# Altium PCB CNC_shield_mkr1000_PCB_v5.PcbDoc
Units mm, origin at the board's own origin, x right, y up, seen from the top; angles counter-clockwise.
Board outline 96.52 x 76.2 mm, 2 copper layers (Top Layer, Bottom Layer); 20 components, 40 nets, 141 pads, 0 vias.
Unrouted connection lines stored in the file: 1.
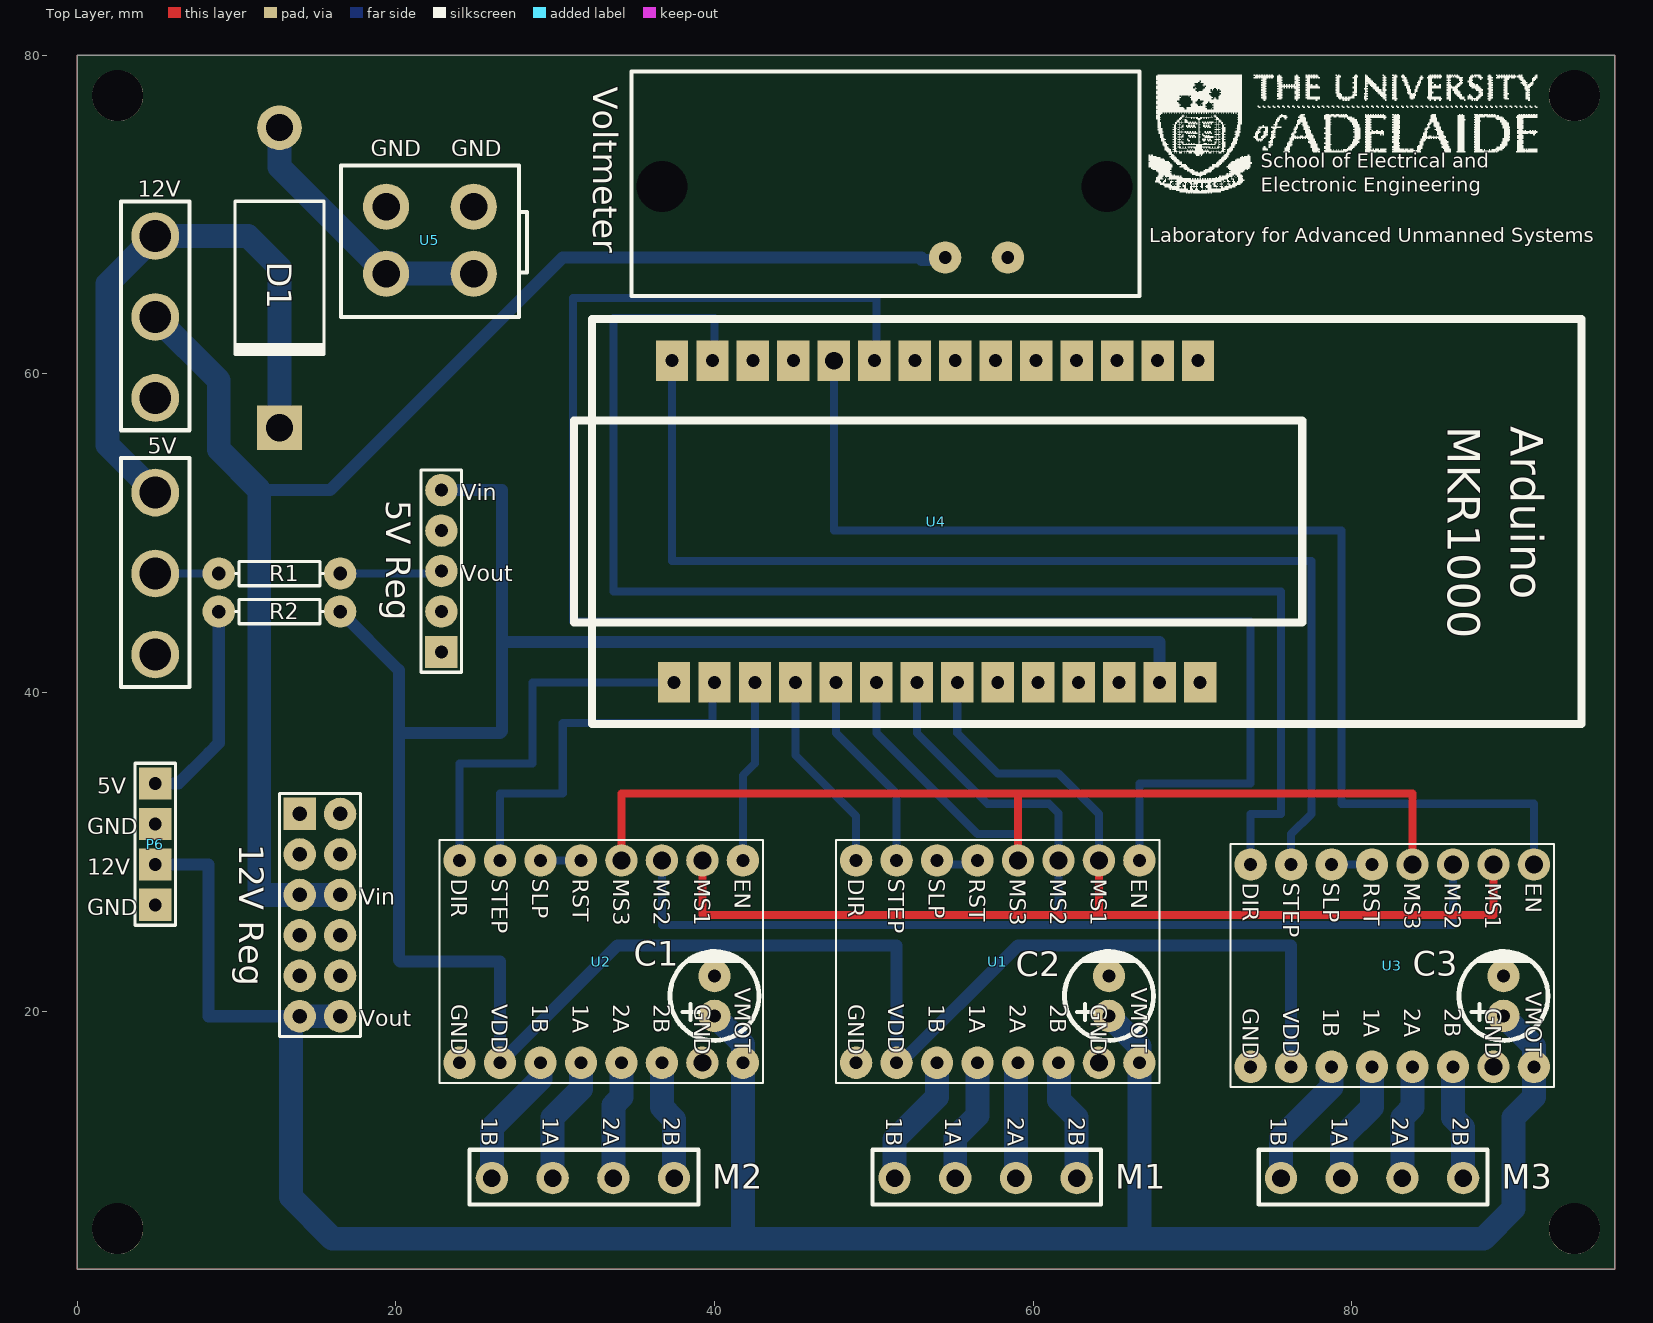
[diagram p0: Top Layer view]
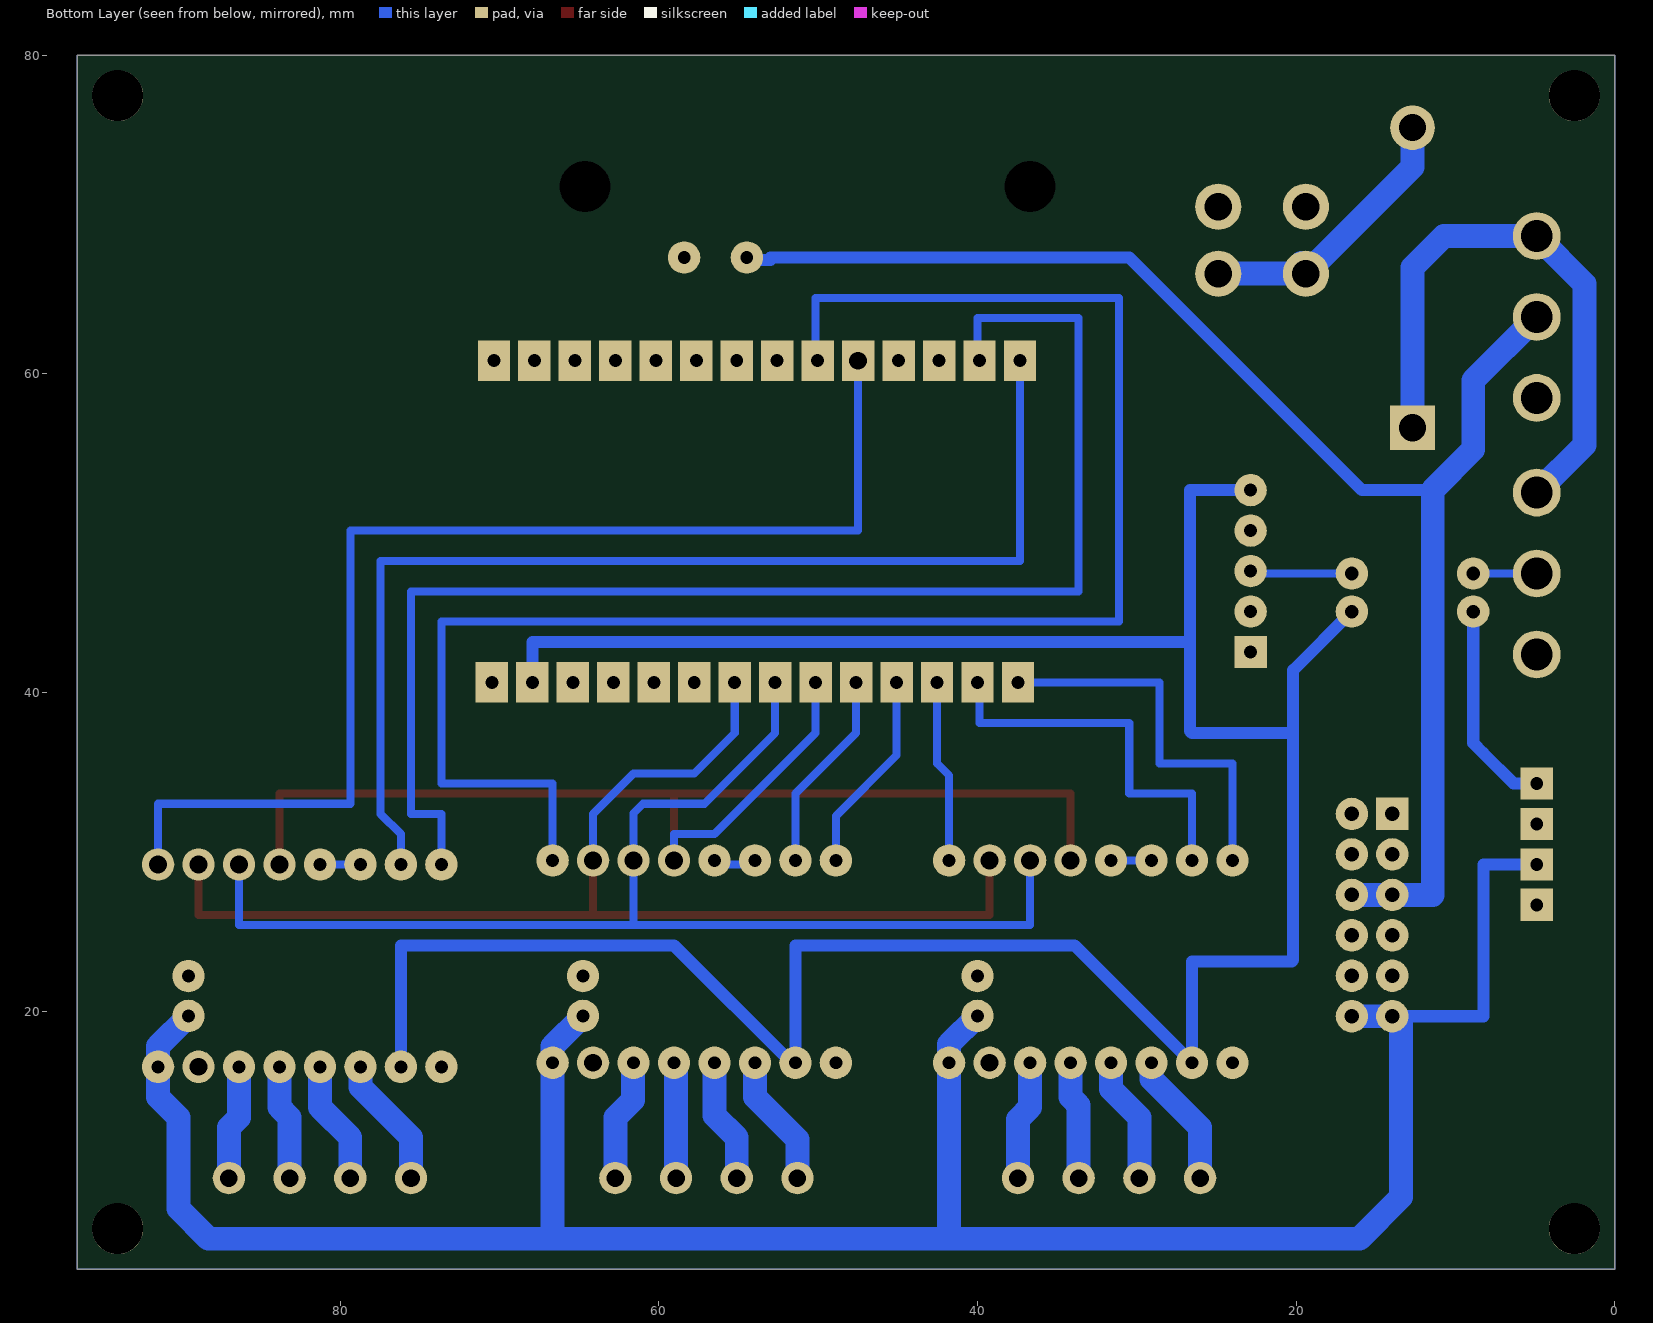
[diagram p1: Bottom Layer view, seen from below]

## Layer stack, top to bottom
Top Solder: solder mask 0.0102, Solder Resist, Dk 3.5
Top Layer: signal copper 0.0356
Dielectric1: dielectric 0.32, FR-4, Dk 4.8
Bottom Layer: signal copper 0.0356
Bottom Solder: solder mask 0.0102, Solder Resist, Dk 3.5

## Board outline
0,3.81 96.52,3.81 96.52,80.01 0,80.01

## Design rules (kind name [scope] priority, off if disabled: settings)
Clearance [All] p1: gap=0.152 ignorepadtopadclearanceinfootprint=FALSE except(0: Arc-Hole Track-Hole SMDPad-Hole THPad-Hole Via-Hole Fill-Hole Poly-Hole Region-Hole Text-Hole)
PlaneClearance [All] p1: clearance=0.203
PolygonConnect [All] p1: connectstyle=Relief reliefconductorwidth=0.508 reliefentries=4 polygonreliefangle="90 Angle" airgapwidth=0.254
RoutingVias [All] p1: holewidth=0.305 width=0.559 viastyle="Through Hole" minholewidth=0.305 minwidth=0.559 maxholewidth=0.305 maxwidth=0.559
SolderMaskExpansion [All] p1: expansion=0.102
Width Power [InNetClass('Power')] p1: maxlimit=1.27 minlimit=0.381 preferedwidth=0.762 minimp=50.000000 maximp=50.000000 favimp=50.000000
Width [All] p2: maxlimit=1.27 minlimit=0.152 preferedwidth=0.508 minimp=50.000000 maximp=50.000000 favimp=50.000000
29 further rules are at their usual default settings.

## Classes and differential pairs
component class CNC_shield_for_mkr1000_Sch: "5V Reg" C1 C2 C3 J1 J2 U1 U2 U4 U5

## Components (designator, comment, footprint, x,y, rotation, side; value= is the part's Value field where it differs from the comment)
5V "Comment" Switch 2.743,40.361 r90 top
"5V Reg" "Header 5" HDR1X5 22.86,42.545 r90 top (schematic designator P4)
12V "Comment" Switch 2.743,56.464 r90 top
"12V Reg" "Comment" HDR2X6 13.97,32.385 r270 top
C1 "C43803" C43803 40.005,20.955 r90 top
C2 "C43803" C43803 64.77,20.955 r90 top
C3 "C43803" C43803 89.535,20.955 r90 top
D1 "Comment" DO-201AD 12.7,66.04 r270 top
M1 "Header 1 x 4" "Female Header for driver" 56.007,9.652 r0 top (schematic designator P1)
M2 "Header 1 x 4" "Female Header for driver" 30.734,9.652 r0 top (schematic designator P2)
M3 "Header 1 x 4" "Female Header for driver" 80.264,9.652 r0 top (schematic designator P3)
P6 "Header 1 x 4" HDR1X4 4.902,26.67 r90 top (schematic designator P2)
R1 "Comment" AXIAL-0.3 12.7,47.473 r0 top
R2 "Comment" AXIAL-0.3 12.7,45.085 r0 top
U1 "A4988" "A4988 DRIVER"#1 57.785,23.114 r270 top
U2 "A4988" "A4988 DRIVER"#1 32.893,23.114 r270 top
U3 "A4988" "A4988 DRIVER"#2 82.55,22.86 r270 top
U4 "MKR 1000" MKR1000 53.911,50.736 r270 top
U5 "ATX 4" ATX4 22.142,68.394 r0 top
Voltmeter "Comment" Voltmeter 50.165,71.628 r0 top

## Footprints (in the part's own frame and the unit in brackets; to place one, negate y for a bottom-side part, rotate by r counter-clockwise, add the part's x,y. Pads: shape width x height; smd on the part's side, far side on the other; paste and mask are expansions set on the pad)
"A4988 DRIVER"#1 [mil]
  round 80 hole 32: 1(-250,350) 5(-250,-50) 6(-250,-150) 7(-250,-250) 8(-250,-350) 9(250,-350) 10(250,-250) 11(250,-150) 12(250,-50) 13(250,50) 14(250,150) 16(250,350)
  round 80 hole 44.02: 2(-250,250)
  round 80 hole 44: 3(-250,150) 4(-250,50) 15(250,250)
  silkscreen extent -300,-400 300,400
"A4988 DRIVER"#2 [mil]
  round 80 hole 44: 1(-250,350) 3(-250,150) 4(-250,50) 15(250,250)
  round 80 hole 44.02: 2(-250,250)
  round 80 hole 32: 5(-250,-50) 6(-250,-150) 7(-250,-250) 8(-250,-350) 9(250,-350) 10(250,-250) 11(250,-150) 12(250,-50) 13(250,50) 14(250,150) 16(250,350)
  silkscreen extent -300,-400 300,400
ATX4 [mil]
  round 114.21 hole 68: 1(-108.25,-82.7) 2(-108.25,82.7) 3(108.25,-82.7) 4(108.25,82.7)
  silkscreen extent -220,-190 240,185
AXIAL-0.3 [mil] "Axial Device, Thru-Hole; 2 Leads; 0.3 in Pin Spacing"
  round 80 hole 33.46: 1(-150,0) 2(150,0)
  silkscreen extent -109,-30 109,30
C43803 [mil] "Polarized Capacitor with 16V 5*7"
  round 80 hole 32: 1(-49.21,0) 2(49.21,0)
  silkscreen extent -110,-110 110,110
DO-201AD [mm] "Diode, Axial; Body 9.5 x 5.6 mm (LxDia. max), Lead Dia. 1.32 mm (max)"
  round 2.8 hole 1.7: 1(-9.42,0)
  rect 2.8x2.8 hole 1.7: 2(9.42,0)
  silkscreen extent -4.8,-2.8 4.9,2.8
"Female Header for driver" [mil] "EC381V"
  round 80 hole 43.31: 1(-185,-5) 2(-35,-5) 3(115,-5) 4(265,-5)
  silkscreen extent -240,-70 325,65
HDR1X4 [mil] "Connector; Header; 4 Position"
  rect 80x80 hole 32: 1(0,0) 2(100,0) 3(200,0) 4(300,0)
  silkscreen extent -50,-50 350,50
HDR1X5 [mil] "Connector; Header; 5 Position"
  rect 80x80 hole 32: 1(0,0)
  round 80 hole 32: 2(100,0) 3(200,0) 4(300,0) 5(400,0)
  silkscreen extent -50,-50 450,50
HDR2X6 [mil] "Connector; Header; 6x2 Position"
  rect 80x80 hole 35.43: 1(0,0)
  round 80 hole 35.43: 2(0,100) 3(100,0) 4(100,100) 5(200,0) 6(200,100) 7(300,0) 8(300,100) 9(400,0) 10(400,100) 11(500,0) 12(500,100)
  silkscreen extent -50,-50 550,150
MKR1000 [mil]
  rect 100x80 hole 32: 1(-397.5,647.5) 1(-397.5,647.5) 2(-397.5,547.5) 2(-397.5,547.5) 3(-397.5,447.5) 4(-397.5,347.5) 5(-397.5,247.5) 6(-397.5,147.5) 7(-397.5,47.5) 8(-397.5,-52.5) 9(-397.5,-152.5) 11(-397.5,-352.5) 12(-397.5,-452.5) 13(-397.5,-552.5) 14(-397.5,-652.5) 15(397.5,-647.5) 16(397.5,-547.5) 17(397.5,-447.5) 18(397.5,-347.5) 19(397.5,-247.5) 20(397.5,-147.5) 21(397.5,-47.5) 22(397.5,52.5) 23(397.5,152.5) 24(397.5,252.5) 25(397.5,352.5) 26(397.5,452.5) 27(397.5,552.5) 28(397.5,652.5)
  rect 100x80 hole 44: 10(-397.5,-252.5)
  silkscreen extent -500,-895 500,1595
Switch [mm]
  round 3 hole 2: 1(2.032,-2.159) 2(7.112,-2.159) 3(12.192,-2.159)
  silkscreen extent 0,-4.32 14.35,0
Voltmeter [mil]
  round 106.3 hole 125.98: 2(-530,5) 2(570,5)
  round 80 hole 31.5: V1(325,-170) V2(170,-170)
  silkscreen extent -605,-265 650,290

## Part data
"5V Reg": library part Header1x5, "Header, 5-Pin"
"12V Reg": library part "Header 6X2"
C1 C2 C3: "Polarized Capacitor"
M1 M2 M3 P6: "Header, 4-Pin"
  M1 M2 M3: LatestRevisionDate=17-Jul-2002, LatestRevisionNote="Re-released for DXP Platform.", Publisher="Altium Limited"
U1 U2 U3: "Motor Driver"
U4: library part "Arduino MKR 1000", "Arduino wifi"
U5: "ATX 4Pins power connector"

## Free pads (board coordinates)
  round 3.2 hole 3.2 unplated: 1(2.54,6.35) 2(2.54,77.47) 3(93.98,6.35) 4(93.98,77.47)

## Nets (pads, with @x,y where several pads share a name; then routed paths per layer and width w, separated by ;. In a path a pad name is that pad's centre, name@x,y a point inside that pad or via, vN(x,y) a via of type N, cw(c..) or ccw(c..) an arc to the next point about the centre after c; other vN are vias at no path point)
GND: "5V Reg.4" "12V Reg.7" "12V Reg.8" "12V Reg.9" "12V Reg.10" C1.2 C2.2 C3.2 P6.1 P6.3 pad.1 U1.9 U1.15 U2.9 U2.15 U3.9 U3.15 U4.25 U5.2 U5.4 Voltmeter.V1 | length 0.3
  Bottom Layer w0.254: U5.4@24.809,70.578 U5.4 ; U2.15@39.094,16.913 U2.15
NetC1_1: 
NetD1_1: 
NetP1_1: M1.1 U1.11 | length 8.1
  Bottom Layer w1.5: M1.1 51.308,11.938 53.975,14.605 U1.11@53.975,16.51
NetP1_2: M1.2 U1.12 | length 7.6
  Bottom Layer w1.5: M1.2 55.118,12.065 56.515,13.462 U1.12@56.515,16.51
NetP1_3: M1.3 U1.13 | length 7
  Bottom Layer w0.508: U1.13@58.928,16.383 U1.13@59.055,16.51
  Bottom Layer w1.5: M1.3 U1.13@58.928,16.383
NetP1_4: M1.4 U1.14 | length 7.5
  Bottom Layer w0.508: U1.14@61.595,16.51 U1.14@61.635,16.47
  Bottom Layer w1.5: U1.14@61.635,16.47 61.635,14.438 62.738,13.335 M1.4
NetP2_1: M2.1 U2.11 | length 8.5
  Bottom Layer w1.5: M2.1 26.035,12.7 29.083,15.748 U2.11
NetP2_2: M2.2 U2.12 | length 8
  Bottom Layer w1.5: M2.2 29.845,13.335 31.623,15.113 U2.12
NetP2_3: M2.3 U2.13 | length 8.2
  Bottom Layer w0.508: U2.13@33.655,16.256 U2.13
  Bottom Layer w1.5: M2.3 33.655,14.097 34.163,14.605 U2.13
NetP2_4: M2.4 U2.14 | length 7.6
  Bottom Layer w1.5: U2.14 36.703,13.97 37.465,13.208 M2.4
NetP3_1: M3.1 U3.11 | length 8.3
  Bottom Layer w1.5: M3.1 75.565,12.065 78.74,15.24 U3.11
NetP3_2: M3.2 U3.12 | length 7.8
  Bottom Layer w1.5: M3.2 79.375,12.065 81.28,13.97 U3.12
NetP3_3: M3.3 U3.13 | length 7.2
  Bottom Layer w1.5: M3.3 83.185,13.335 83.82,13.97 U3.13
NetP3_4: M3.4 U3.14 | length 7.2
  Bottom Layer w1.5: U3.14 86.36,13.335 86.995,12.7 M3.4
NetP4_3: 
NetP4_5: "5V Reg.5" P6.4 R2.1 R2.2 U1.10 U2.10 U3.10 U4.27 | length 189.5
  Bottom Layer w0.762: P6.4 6.35,34.29 8.255,36.195 8.89,36.83 R2.1 ; R2.2 20.193,41.402 20.193,23.203 ; 20.282,23.114 26.543,23.114 ; 20.32,37.465 26.543,37.465 26.67,37.592 26.67,43.18 ; 22.86,52.705 26.67,52.705 26.67,43.18 ; 26.543,23.038 U2.10 33.909,24.13 51.435,24.13 51.435,16.51 59.055,24.13 76.2,24.13 U3.10 ; U4.27 67.945,43.18 26.67,43.18
NetU1_1: U1.1 U4.9 | length 108.1
  Bottom Layer w0.508: U4.9 50.165,60.96 50.165,64.77 31.115,64.77 31.115,44.45 73.66,44.45 73.66,34.29 66.675,34.29 U1.1 U1.1@66.675,29.21
NetU1_2: U1.2 U2.2 U3.2 U4.22 | length 76.8
  Top Layer w0.508: U2.2 39.243,26.035 64.135,26.035 ; U1.2@64.135,29.21 64.135,26.035 ; U3.2 88.9,26.035 64.135,26.035
  Bottom Layer w0.508: U4.22 55.245,37.465 57.785,34.925 61.595,34.925 64.135,32.385 U1.2 U1.2@64.135,29.21
NetU1_3: U1.3 U2.3 U3.3 U4.21 | length 78.7
  Bottom Layer w0.508: U2.3 36.703,25.4 61.595,25.4 ; U4.21 52.705,37.465 57.15,33.02 61,33.02 61.595,32.425 U1.3 61.595,25.4 ; U3.3 86.36,25.4 61.595,25.4
NetU1_4: U1.4 U2.4 U3.4 U4.20 | length 79.4
  Top Layer w0.508: U2.4 34.163,33.655 58.991,33.655 ; U1.4@59.055,29.21 U1.4 59.055,33.591 58.991,33.655 ; U3.4 83.82,33.655 58.991,33.655
  Bottom Layer w0.508: U4.20 50.165,37.465 56.515,31.115 59.055,31.115 U1.4 U1.4@59.055,29.21
NetU1_5: U1.5 U1.6 | length 2.5
  Bottom Layer w0.508: U1.6@53.975,29.21 U1.5@56.515,29.21
NetU1_7: U1.7 U4.19 | length 13
  Bottom Layer w0.508: U4.19 47.625,37.465 51.435,33.655 U1.7 U1.7@51.435,29.21
NetU1_8: U1.8 U4.18 | length 13
  Bottom Layer w0.508: U4.18 45.085,36.068 48.895,32.258 U1.8 U1.8@48.895,29.21
NetU2_1: U2.1 U4.17 | length 11.5
  Bottom Layer w0.508: U2.1 41.783,34.798 42.545,35.56 U4.17
NetU2_5: U2.5 U2.6 | length 2.5
  Bottom Layer w0.508: U2.6 U2.5
NetU2_7: U2.7 U4.16 | length 24.6
  Bottom Layer w0.508: U2.7 26.543,33.655 30.48,33.655 30.48,38.1 39.878,38.1 39.878,40.513 U4.16
NetU2_8: U2.8 U4.15 | length 24.6
  Bottom Layer w0.508: U2.8 24.003,35.56 28.575,35.56 28.575,40.64 U4.15
NetU3_1: U3.1 U4.10 | length 75.6
  Bottom Layer w0.508: U4.10 47.498,50.165 79.375,50.165 79.375,33.02 91.44,33.02 U3.1
NetU3_5: U3.5 U3.6 | length 2.5
  Bottom Layer w0.508: U3.6 U3.5
NetU3_7: U3.7 U4.14 | length 72.3
  Bottom Layer w0.508: U4.14 37.338,48.26 77.47,48.26 77.47,32.385 76.2,31.115 U3.7
NetU3_8: U3.8 U4.13 | length 87.2
  Bottom Layer w0.508: U4.13 40.005,60.96 40.005,63.5 33.655,63.5 33.655,46.355 75.565,46.355 75.565,32.385 73.66,32.385 U3.8
RegulatorNet: 12V.2 "12V Reg.5" "12V Reg.6" Voltmeter.V2 | length 93.4
  Bottom Layer w0.508: 52.996,67.161 52.996,67.31 ; Voltmeter.V2@54.334,67.161 Voltmeter.V2
  Bottom Layer w0.762: 11.43,52.705 15.875,52.705 30.48,67.31 52.996,67.31 ; 52.996,67.161 Voltmeter.V2@54.334,67.161
  Bottom Layer w1.5: 12V.2 8.89,59.588 8.89,55.245 11.43,52.705 11.43,27.305 13.97,27.305 16.51,27.305
RegulatorOutNet: "12V Reg.11" "12V Reg.12" C1.1 C2.1 C3.1 P6.2 U1.16 U2.16 U3.16 | length 154
  Bottom Layer w0.762: P6.2 8.255,29.21 8.255,19.685 13.97,19.685
  Bottom Layer w1.5: 16.51,19.685 13.97,19.685 13.411,19.126 13.411,8.331 16.027,5.715 41.783,5.715 ; C1.1 41.783,17.927 U2.16 41.783,5.715 ; C2.1 66.675,17.8 U1.16 ; U1.16@66.675,16.51 66.675,5.715 ; C3.1 91.44,17.8 U3.16 91.44,14.605 90.17,13.335 90.17,7.62 88.265,5.715 66.675,5.715 ; 41.783,5.715 66.675,5.715
switch1-1: 5V.3 12V.3 D1.2 | length 37.3
  Bottom Layer w1.5: 5V.3 1.905,55.55 1.905,65.659 12V.3 10.719,68.656 12.7,66.675 D1.2
switch1-2: 
switch2-1: D1.1 U5.1 U5.3 | length 17.9
  Bottom Layer w1.5: D1.1 12.7,72.987 U5.1 ; U5.1@19.393,66.954 19.667,66.954 20.053,66.568 20.053,66.294 U5.3
switch2-2: 5V.2 "5V Reg.3" R1.1 R1.2 | length 10.4
  Bottom Layer w0.508: 5V.2 R1.1 ; R1.2 22.708,47.473 22.86,47.625
Volt1: 
Volt2: 
pads on no net: 5V.1 12V.1 "5V Reg.1" "5V Reg.2" "12V Reg.1" "12V Reg.2" "12V Reg.3" "12V Reg.4" U4.1 U4.2 U4.3 U4.4 U4.5 U4.6 U4.7 U4.8 U4.11 U4.12 U4.23 U4.24 U4.26 U4.28 Voltmeter.2

## Polygon pours and split planes (outlines as drawn)
GND on Bottom Layer "NONET_L02_P115" (solid, remove dead copper, shelved, pour order 115): 0,80.01 0,3.81 96.52,3.81 96.52,80.01
GND on Top Layer "NONET_L01_P117" (solid, remove dead copper, shelved, pour order 117): 0,80.01 96.52,80.01 96.52,3.81 0,3.81

## Silkscreen, mask and mechanical layers (free items; w line width, h text height)
Top Overlay:
  drawing of 117 lines, arcs and shapes, not listed
  text "GND" at 18.415,73.66 h1
  text "GND" at 23.495,73.66 h1
  text "School of Electrical and  / Electronic Engineering" at 74.295,71.12 h1.52
  text "Laboratory for Advanced Unmanned Systems" at 67.31,67.945 h1.52
  text "Vin" at 24.13,52.07 h1
  text "Vout" at 24.13,46.99 h1
  text "5V" at 1.27,33.655 h1
  text "GND" at 0.635,31.115 h1
  text "12V" at 0.635,28.575 h1
  text "Vin" at 17.78,26.67 h1
  text "GND" at 0.635,26.035 h1
  text "Vout" at 17.78,19.05 h1
  text "1B" at 25.4,13.335 h1 r270
  text "1A" at 29.21,13.335 h1 r270
  text "2A" at 33.02,13.335 h1 r270
  text "2B" at 36.83,13.335 h1 r270
  text "1B" at 50.8,13.335 h1 r270
  text "1A" at 54.483,13.335 h1 r270
  text "2A" at 58.42,13.335 h1 r270
  text "2B" at 62.23,13.335 h1 r270
  text "1B" at 74.93,13.335 h1 r270
  text "1A" at 78.74,13.335 h1 r270
  text "2A" at 82.55,13.335 h1 r270
  text "2B" at 86.36,13.335 h1 r270
Mechanical 1:
  the board outline again, w0.254

## Text inside footprints (layer, text, board x,y; h text height)
U1: Top Overlay "SLP" at 53.467,28.321 h1.02 r270; Top Overlay "RST" at 56.007,28.321 h1.02 r270; Top Overlay "EN" at 66.167,28.321 h1.02 r270; Top Overlay "VMOT" at 66.167,21.463 h1.02 r270; Top Overlay "GND" at 63.627,20.447 h1.02 r270; Top Overlay "2B" at 61.087,20.447 h1.02 r270; Top Overlay "2A" at 58.547,20.447 h1.02 r270; Top Overlay "1A" at 56.007,20.447 h1.02 r270; Top Overlay "1B" at 53.467,20.447 h1.02 r270; Top Overlay "VDD" at 50.927,20.447 h1.02 r270; Top Overlay "GND" at 48.387,20.447 h1.02 r270; Top Overlay "DIR" at 48.387,28.321 h1.02 r270; Top Overlay "STEP" at 50.927,28.321 h1.02 r270; Top Overlay "MS3" at 58.547,28.321 h1.02 r270; Top Overlay "MS2" at 61.087,28.321 h1.02 r270; Top Overlay "MS1" at 63.627,28.321 h1.02 r270
U2: Top Overlay "SLP" at 28.575,28.321 h1.02 r270; Top Overlay "RST" at 31.115,28.321 h1.02 r270; Top Overlay "EN" at 41.275,28.321 h1.02 r270; Top Overlay "VMOT" at 41.275,21.463 h1.02 r270; Top Overlay "GND" at 38.735,20.447 h1.02 r270; Top Overlay "2B" at 36.195,20.447 h1.02 r270; Top Overlay "2A" at 33.655,20.447 h1.02 r270; Top Overlay "1A" at 31.115,20.447 h1.02 r270; Top Overlay "1B" at 28.575,20.447 h1.02 r270; Top Overlay "VDD" at 26.035,20.447 h1.02 r270; Top Overlay "GND" at 23.495,20.447 h1.02 r270; Top Overlay "DIR" at 23.495,28.321 h1.02 r270; Top Overlay "STEP" at 26.035,28.321 h1.02 r270; Top Overlay "MS3" at 33.655,28.321 h1.02 r270; Top Overlay "MS2" at 36.195,28.321 h1.02 r270; Top Overlay "MS1" at 38.735,28.321 h1.02 r270
U3: Top Overlay "SLP" at 78.232,28.067 h1.02 r270; Top Overlay "RST" at 80.772,28.067 h1.02 r270; Top Overlay "EN" at 90.932,28.067 h1.02 r270; Top Overlay "VMOT" at 90.932,21.209 h1.02 r270; Top Overlay "GND" at 88.392,20.193 h1.02 r270; Top Overlay "2B" at 85.852,20.193 h1.02 r270; Top Overlay "2A" at 83.312,20.193 h1.02 r270; Top Overlay "1A" at 80.772,20.193 h1.02 r270; Top Overlay "1B" at 78.232,20.193 h1.02 r270; Top Overlay "VDD" at 75.692,20.193 h1.02 r270; Top Overlay "GND" at 73.152,20.193 h1.02 r270; Top Overlay "DIR" at 73.152,28.067 h1.02 r270; Top Overlay "STEP" at 75.692,28.067 h1.02 r270; Top Overlay "MS3" at 83.312,28.067 h1.02 r270; Top Overlay "MS2" at 85.852,28.067 h1.02 r270; Top Overlay "MS1" at 88.392,28.067 h1.02 r270
U4: Top Overlay "Arduino" at 89.98,56.706 h2.03 r270; Top Overlay "MKR1000" at 86.042,56.706 h2.03 r270